# EAGLE board AlidadeEEBoxPowerSupply (EAGLE 4.13)
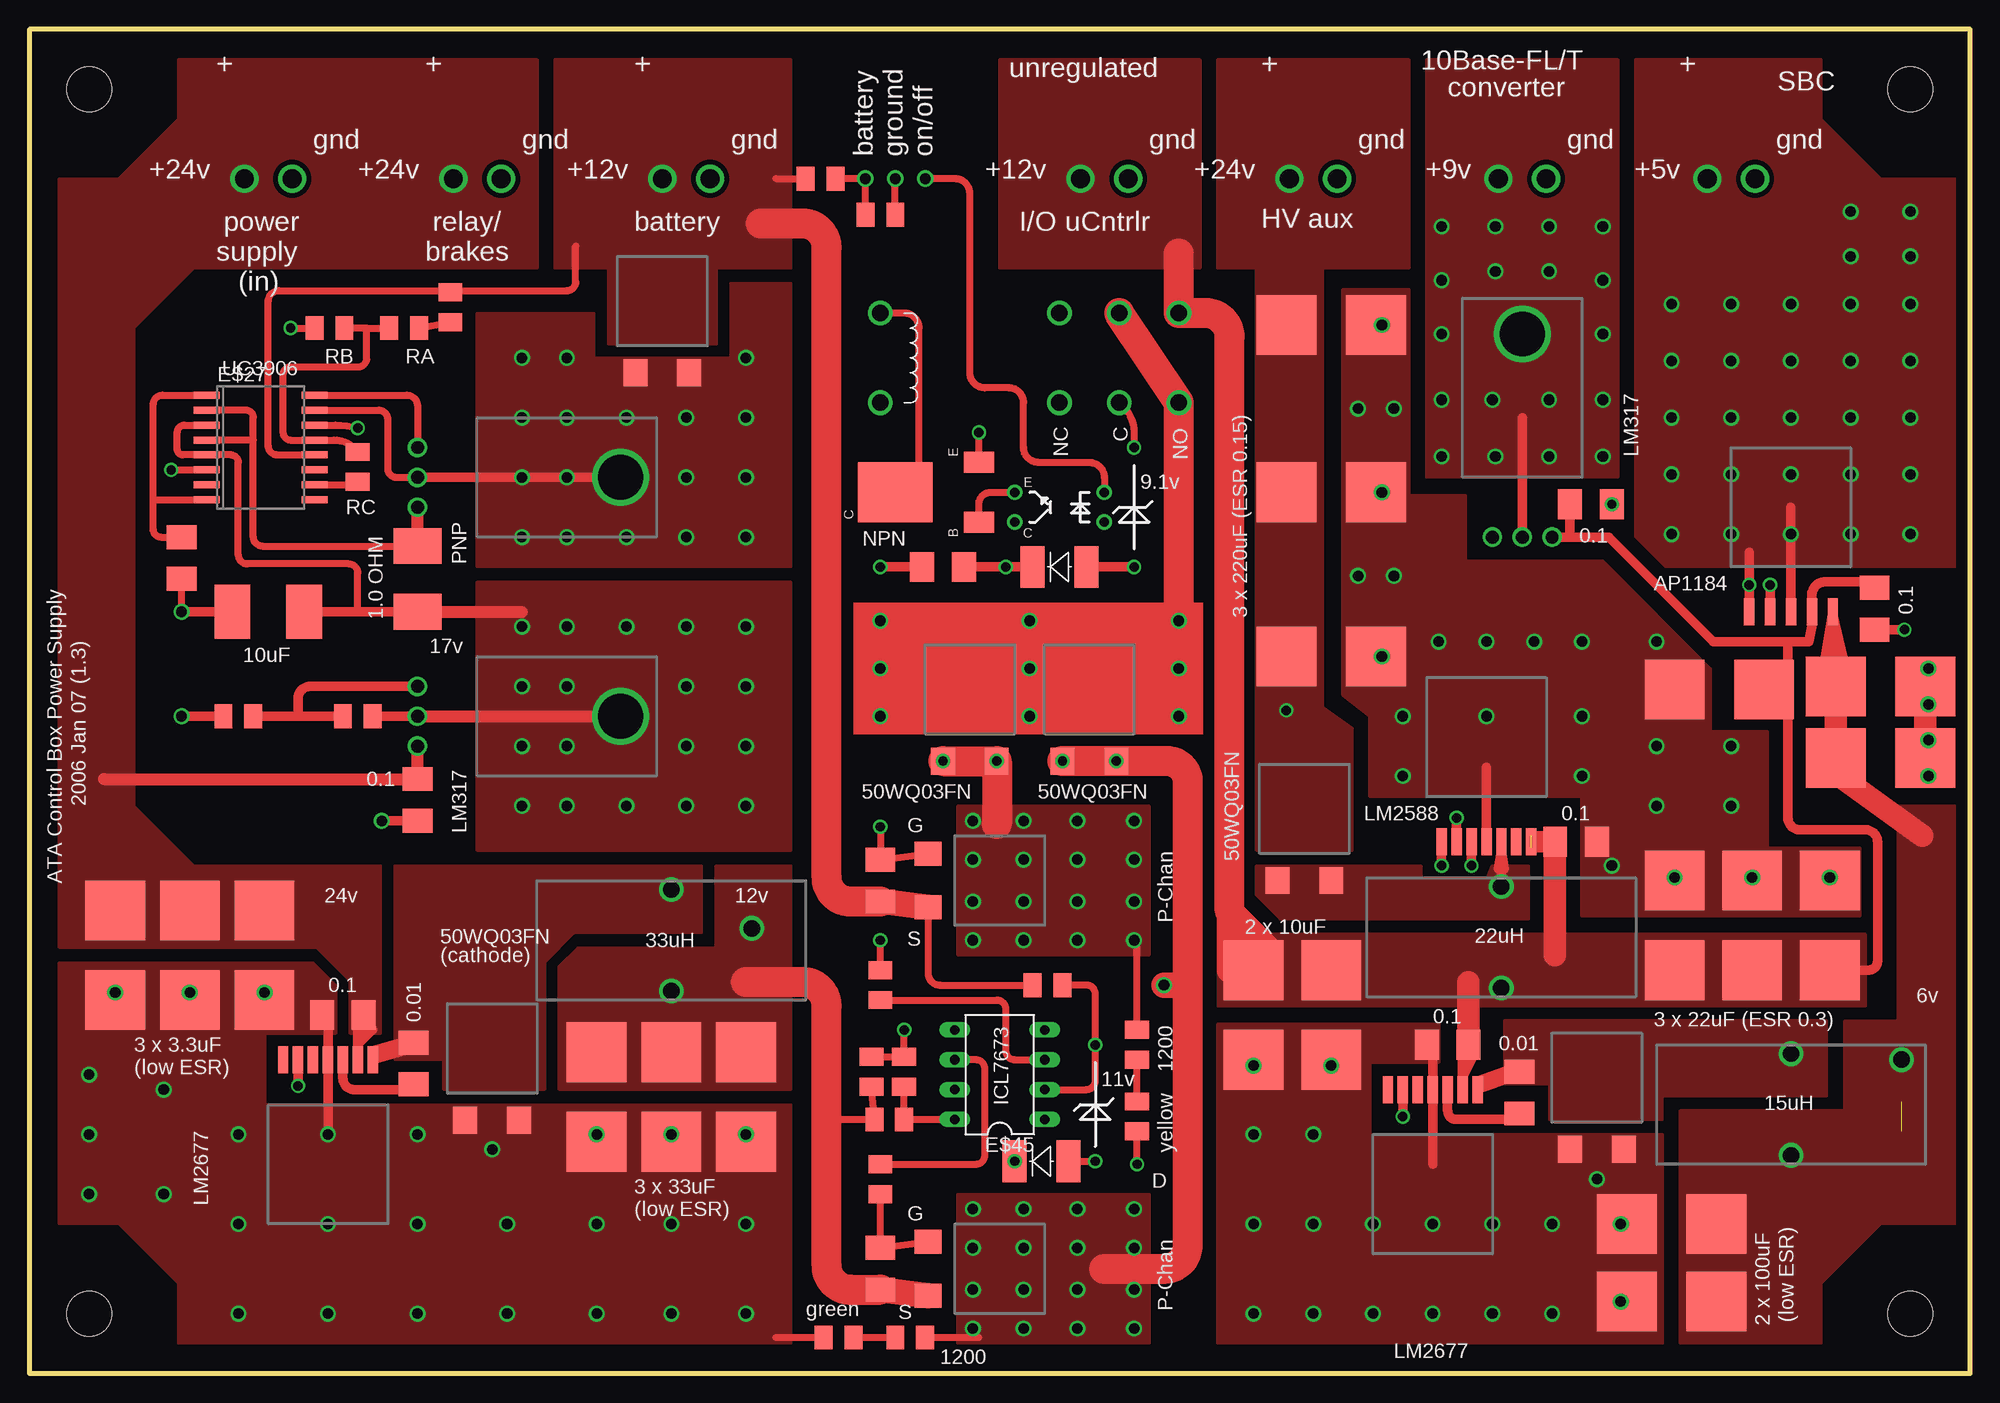
[diagram p0: board, top side]
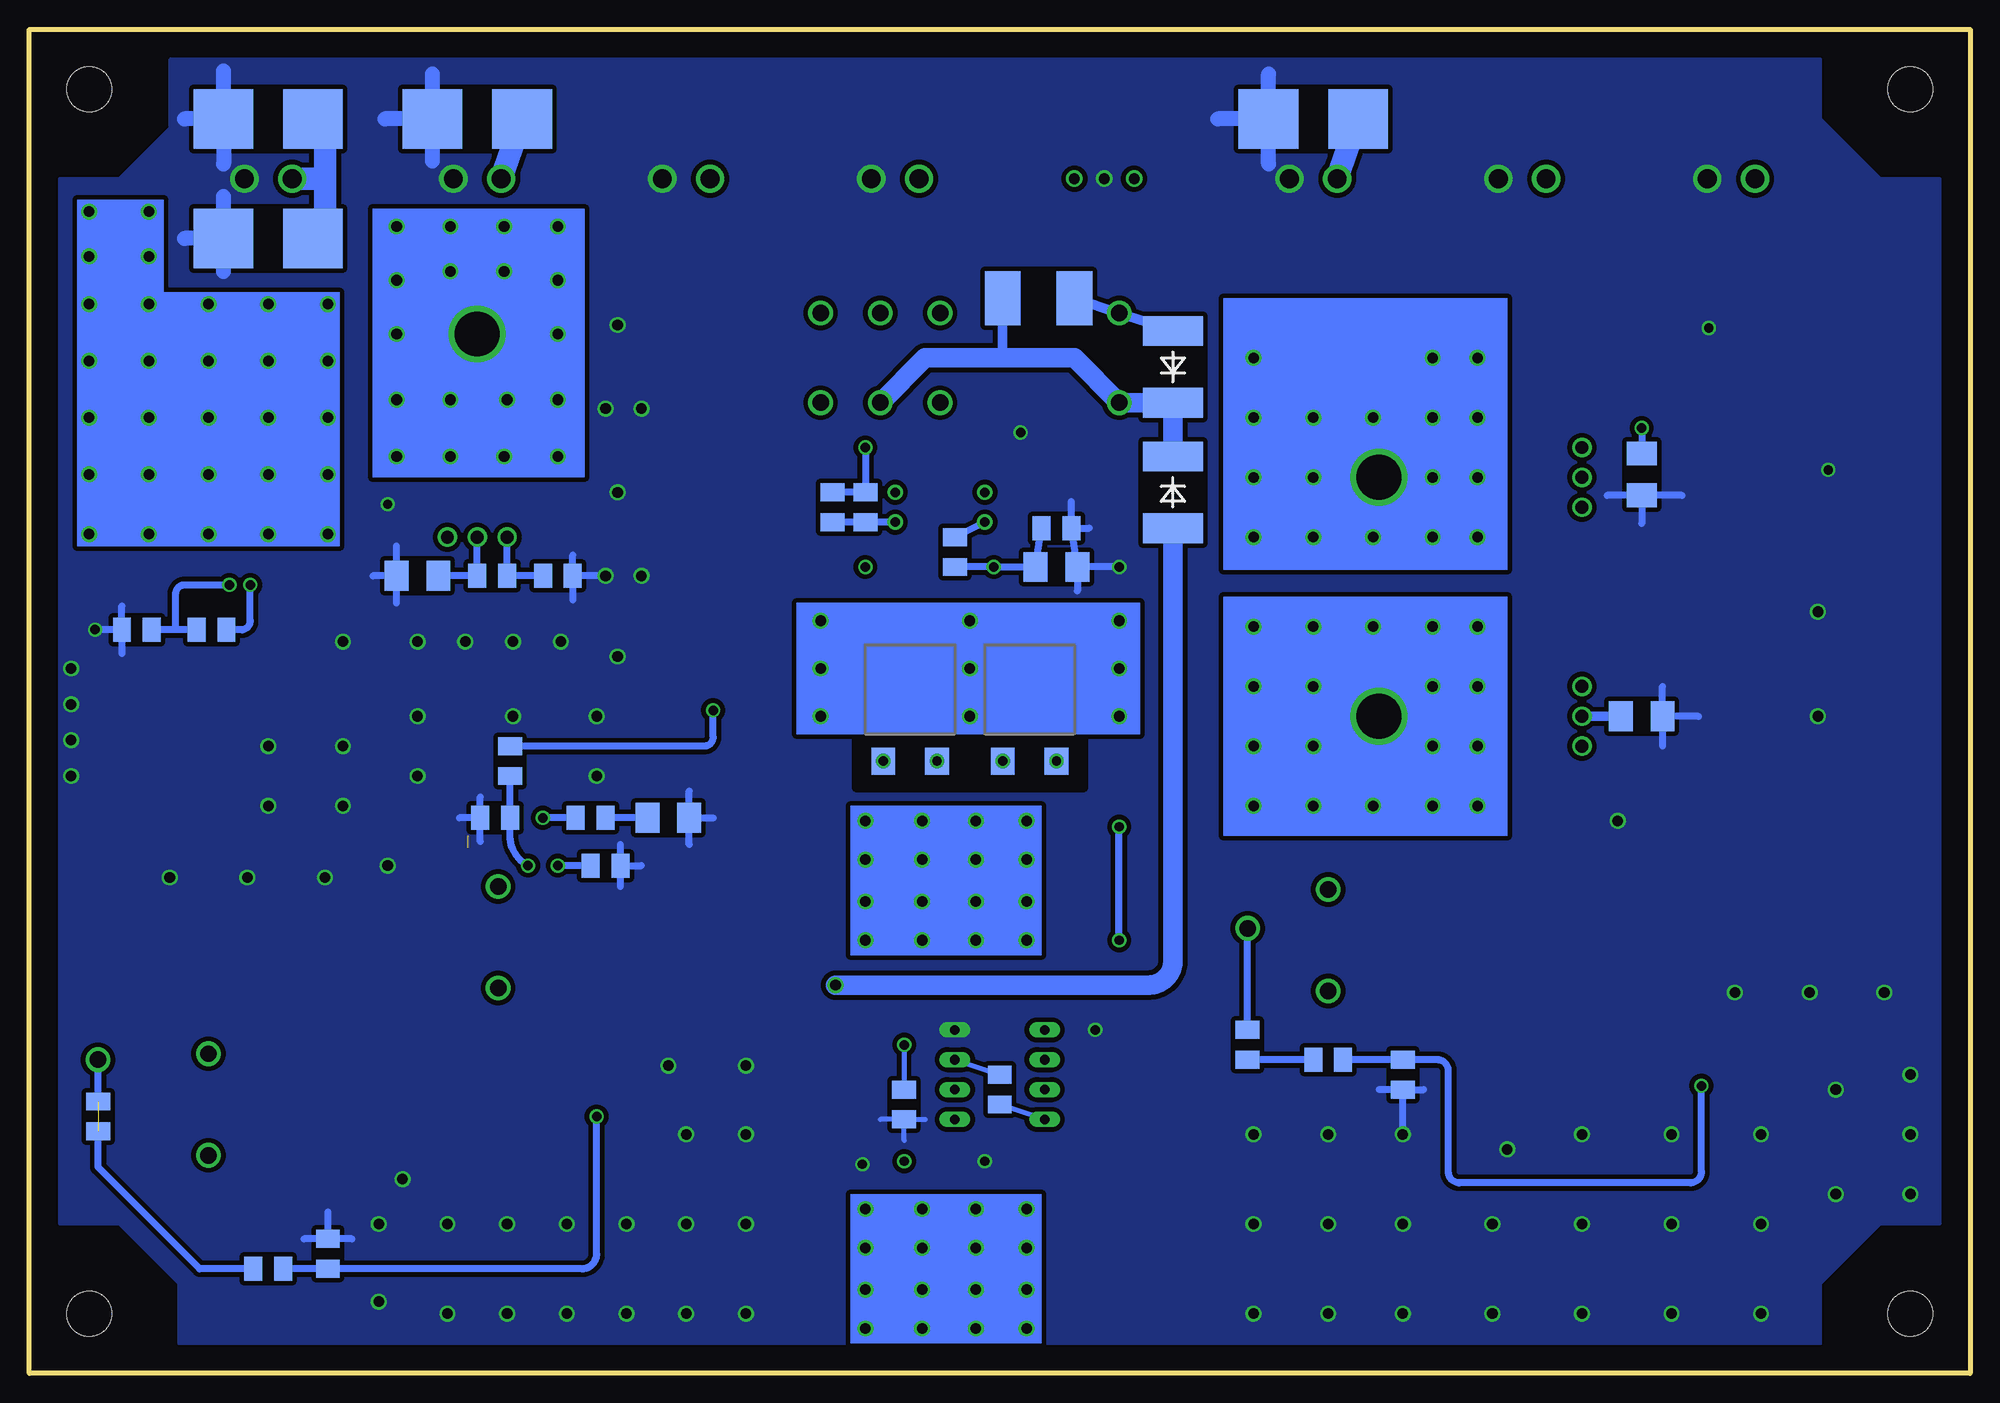
[diagram p1: board, bottom side, seen from below]

Size 165.1 x 114.3 mm. Coordinates in mm from the lower left corner, seen from the top.
Outline: 0,0 165.1,0 165.1,114.3 0,114.3 0,0
Copper layers (1*16): Top 0.035mm / dielectric 1.5mm / Bottom 0.035mm
Design rules "default": minimum track width 10mil, minimum drill 24mil, track to track 8mil, track to pad 8mil, pad to pad 8mil, via to via 8mil, smd to smd 8mil, copper to edge 40mil, drill to drill 8mil, minimum pad ring 10mil, minimum via ring 8mil, stop-mask expansion 4mil, vias tented up to drill 0mil, thermal gap 10mil
Holes 3.81 mm at 160.02,109.22 160.02,5.08 5.08,5.08 5.08,109.22
bRestrict: area 60.5,27.4 to 62.5,28.4; area 47.2,23.4 to 49.3,25.9; area 25.1,54.6 to 28.7,57.1; area 26.7,73.7 to 29.2,77.2; area 65.3,83.8 to 70.4,87.4; area 93,71.6 to 97.8,75.7; area 143.5,104.1 to 151.1,109.2; area 143.5,94 to 151.1,99.1; area 149.1,62.2 to 150.1,64.3; area 155.4,62.2 to 158,64.3; area 125.7,104.1 to 133.3,109.2; area 125.2,66.8 to 126.2,68.8; 20 more areas

## Footprints (pad centres in the part's own frame; a part is rotated, then mirrored left to right if it is on the bottom)
SMD0805 = smd 2.032 x 1.524: P$1 0,1.27; P$2 0,-1.27
LARGETANTALUM = smd 5.08 x 5.08: P$1 0,3.81; P$2 0,-3.81
TWOPRONGPWRCONNECTOR = drill 1.6 round: P$1 -2.032,0; P$2 2.032,0
3PINHEADER = drill 0.9 round: P$1 0,0; P$2 -2.54,0; P$3 2.54,0
LM2677 = smd 0.889 x 2.286: P$1 0,6.35; P$2 -2.54,6.35; P$3 -1.27,6.35; P$4 -3.81,6.35; P$5 2.54,6.35; P$6 1.27,6.35; P$7 3.81,6.35
SMD1206 = smd 2.54 x 2.032: P$1 0,1.778; P$2 0,-1.778
50WQ03FN = smd 2.032 x 2.286: P$1 -2.286,4.826; P$2 2.286,4.826
MEDIUMVERTINDUCTOR = drill 1.4 round: P$1 0,4.318; P$2 0,-4.318
LM317T = drill 3.81 round: P$1 0,7.112 | drill 1.1 round: P$2 0,-10.16; P$3 -2.54,-10.16; P$4 2.54,-10.16
SO16L = smd 0.6 x 2.2: 1 -4.445,-4.6; 2 -3.175,-4.6; 3 -1.905,-4.6; 4 -0.635,-4.6; 5 0.635,-4.6; 6 1.905,-4.6; 7 3.175,-4.6; 8 4.445,-4.6; 9 4.445,4.6; 10 3.175,4.6; 11 1.905,4.6; 12 0.635,4.6; 13 -0.635,4.6; 14 -1.905,4.6; 15 -3.175,4.6; 16 -4.445,4.6
MJE2955T = drill 3.81 round: P$1 0,7.112 | drill 1.1 round: P$2 0,-10.16; P$3 -2.54,-10.16; P$4 2.54,-10.16
RESISTOR1WSMD = smd 4.064 x 3.048: P$1 0,2.794; P$2 0,-2.794
SMALLTANTALUM = smd 4.572 x 3.048: P$1 0,3.048; P$2 0,-3.048
DIL08 = drill 0.813 long: 1 -3.81,-3.81; 2 -1.27,-3.81; 3 1.27,-3.81; 4 3.81,-3.81; 5 3.81,3.81; 6 1.27,3.81; 7 -1.27,3.81; 8 -3.81,3.81
RELAY12VDPDT5A = drill 1.4 round: P$1 -3.81,12.7; P$2 3.81,12.7; P$3 -3.81,-2.54; P$4 -3.81,-7.62; P$5 -3.81,-12.7; P$6 3.81,-12.7; P$7 3.81,-7.62; P$8 3.81,-2.54
SCHOTTKYDIODESMC = smd 5.08 x 2.54: P$1 0,3.048; P$2 0,-3.048
OPTOISOLATOR4PIN = drill 0.8 round: P$1 -3.81,1.27; P$2 -3.81,-1.27; P$3 3.81,1.27; P$4 3.81,-1.27
DPAK = smd 5.08 x 6.35: P$1 0,4.572 | smd 1.778 x 2.54: P$2 -2.54,-2.54; P$3 2.54,-2.54
SILICONDIODESMA = smd 3.556 x 2.032: P$1 0,2.286; P$2 0,-2.286
AP1184 = smd 0.889 x 2.286: P$1 0,6.35; P$3 -1.778,6.35; P$4 -3.556,6.35; P$6 1.778,6.35; P$7 3.556,6.35

## Placement (x,y rotation side)
E$1  [SMD0805]  149.61,63.25 90 bottom
E$2  [SMD0805]  155.96,63.25 90 bottom
E$3  [LARGETANTALUM]  127,106.68 90 bottom
E$4  [SMD0805]  120.14,67.82 90 bottom
E$5  [TWOPRONGPWRCONNECTOR]  20.32,101.6 0 top
E$6  [TWOPRONGPWRCONNECTOR]  38.1,101.6 0 top
E$7  [TWOPRONGPWRCONNECTOR]  144.78,101.6 0 top
E$8  [TWOPRONGPWRCONNECTOR]  55.88,101.6 0 top
E$9  [TWOPRONGPWRCONNECTOR]  91.44,101.6 0 top
E$10  [TWOPRONGPWRCONNECTOR]  127,101.6 0 top
E$11  [TWOPRONGPWRCONNECTOR]  109.22,101.6 0 top
E$12  [3PINHEADER]  73.66,101.6 0 top
E$13  [LM2677]  25.4,20.32 0 top
E$14  [SMD1206]  32.7,26.35 0 top
E$15  [50WQ03FN]  39.37,26.35 180 top
E$16  [LARGETANTALUM]  48.26,23.5 0 top
E$17  [LARGETANTALUM]  54.61,23.5 0 top
E$18  [LARGETANTALUM]  60.96,23.5 0 top
E$19  [SMD1206]  26.67,30.48 90 top
E$20  [LARGETANTALUM]  20,35.56 0 top
E$21  [LARGETANTALUM]  13.65,35.56 0 top
E$22  [LARGETANTALUM]  7.3,35.56 0 top
E$23  [MEDIUMVERTINDUCTOR]  54.61,36.83 0 top
E$24  [SMD0805]  61.47,27.94 180 bottom
E$25  [LM317T]  43.18,55.88 270 top
E$26  [SMD0805]  48.26,25.4 180 bottom
E$27  [SO16L]  19.68,78.74 270 top
E$28  [MJE2955T]  43.18,76.2 270 top
E$29  [50WQ03FN]  53.85,89.92 180 top
E$30  [RESISTOR1WSMD]  33.02,67.56 0 top
E$31  [SMD1206]  33.02,48.77 0 top
E$32  [SMD1206]  27.94,55.88 90 bottom
E$33  [SMD0805]  27.94,55.88 90 top
E$34  [SMD0805]  17.78,55.88 90 top
E$35  [SMALLTANTALUM]  20.32,64.77 90 top
E$36  [SMD1206]  12.95,69.34 0 top
E$37  [SMD0805]  27.94,77.09 0 top
E$38  [SMD1206]  27.94,76.45 0 bottom
E$39  [SMD0805]  31.88,88.9 90 top
E$40  [SMD0805]  25.53,88.9 90 top
E$41  [50WQ03FN]  80.01,56.9 180 top
E$42  [50WQ03FN]  81.28,41.91 90 top
E$43  [50WQ03FN]  90.17,56.9 180 top
E$44  [50WQ03FN]  81.28,8.89 90 top
E$45  [DIL08]  82.55,25.4 90 top
E$46  [SMD1206]  72.39,41.91 0 top
E$47  [SMD1206]  72.39,8.89 0 top
E$48  [RELAY12VDPDT5A]  85.09,86.36 90 top
E$49  [SCHOTTKYDIODESMC]  67.82,85.6 0 bottom
E$50  [OPTOISOLATOR4PIN]  87.63,73.66 180 top
E$51  [DPAK]  78.23,74.93 90 top
E$52  [SCHOTTKYDIODESMC]  67.82,74.93 180 bottom
E$53  [SMD0805]  93.98,73.66 0 bottom
E$54  [SILICONDIODESMA]  87.63,68.58 270 top
E$55  [SMD1206]  77.72,68.58 270 bottom
E$56  [SMD1206]  77.72,68.58 90 top
E$57  [LARGETANTALUM]  55.88,106.68 270 bottom
E$58  [SMD0805]  73.15,21.59 90 top
E$59  [SMD0805]  74.42,25.65 180 top
E$60  [SMD0805]  72.39,16.51 180 top
E$61  [SMD0805]  96.77,73.66 0 bottom
E$62  [SMD0805]  86.61,33.02 90 top
E$63  [SMD0805]  94.23,27.94 0 top
E$64  [SMD0805]  94.23,21.84 0 top
E$65  [SMD0805]  72.39,33.02 0 top
E$66  [SMD0805]  68.83,3.05 90 top
E$67  [SMD0805]  74.93,3.05 90 top
E$68  [LM2677]  119.38,17.78 0 top
E$69  [SMD1206]  120.65,27.94 90 top
E$70  [LARGETANTALUM]  110.74,30.48 0 top
E$71  [LARGETANTALUM]  104.14,30.48 0 top
E$72  [SMD1206]  126.75,23.88 0 top
E$73  [50WQ03FN]  133.35,23.88 180 top
E$74  [MEDIUMVERTINDUCTOR]  149.86,22.86 0 top
E$75  [LARGETANTALUM]  139.7,12.7 90 top
E$76  [LARGETANTALUM]  139.7,6.1 90 top
E$77  [LARGETANTALUM]  139.95,38.1 0 top
E$78  [LARGETANTALUM]  153.16,38.1 0 top
E$79  [LARGETANTALUM]  146.56,38.1 0 top
E$80  [MEDIUMVERTINDUCTOR]  125.22,37.08 180 top
E$81  [50WQ03FN]  108.46,46.74 180 top
E$82  [LM2677]  123.95,51.56 180 top
E$83  [LARGETANTALUM]  110.74,89.15 90 top
E$84  [LARGETANTALUM]  110.74,74.93 90 top
E$85  [LARGETANTALUM]  110.74,60.96 90 top
E$86  [LM317T]  127,81.28 0 top
E$87  [AP1184]  149.86,71.12 180 top
E$88  [SMD1206]  131.57,45.21 90 top
E$89  [LARGETANTALUM]  157.48,58.42 90 top
E$90  [LARGETANTALUM]  157.48,52.32 90 top
E$91  [SMD1206]  156.97,65.02 180 top
E$92  [SMD1206]  132.84,73.91 90 top
E$93  [LARGETANTALUM]  144.78,106.68 270 bottom
E$94  [LARGETANTALUM]  144.78,96.52 270 bottom
E$95  [SMD0805]  125.73,67.82 90 bottom
E$96  [SMD1206]  132.08,67.82 270 bottom
E$97  [SMD0805]  117.35,47.24 270 bottom
E$98  [SMD0805]  116.08,43.18 270 bottom
E$99  [SMD1206]  110.74,47.24 270 bottom
E$100  [SMD0805]  125.48,47.24 270 bottom
E$101  [SMD0805]  124.21,52.07 180 bottom
E$102  [SMD0805]  139.7,10.16 180 bottom
E$103  [SMD0805]  144.78,8.89 90 bottom
E$104  [SMD0805]  67.31,101.6 90 top
E$105  [SMD0805]  72.39,98.55 90 top
E$106  [SMD0805]  82.55,24.13 0 bottom
E$107  [SMD0805]  54.61,26.67 270 bottom
E$108  [SMD0805]  159.26,21.84 0 bottom
E$109  [SMALLTANTALUM]  79.25,91.44 270 bottom
E$110  [SMD0805]  77.72,71.88 270 bottom
E$111  [SMD0805]  86.36,69.85 180 bottom
E$112  [SMD0805]  90.68,22.86 0 bottom
E$113  [LARGETANTALUM]  143.76,58.17 90 top
E$114  [SMD0805]  35.81,90.68 0 top
E$115  [SMD0805]  71.63,25.65 0 top
E$116  [SILICONDIODESMA]  86.11,18.03 270 top
E$117  [50WQ03FN]  80.01,56.9 180 bottom
E$118  [50WQ03FN]  90.17,56.9 180 bottom

## Library data of the parts
E$1-E$26 E$28-E$44 E$46-E$118 = rfa
E$27 = linear
E$45 = ic-package

## Nets
GND: E$2.P$1 E$3.P$1 E$4.P$2 E$5.P$2 E$6.P$2 E$7.P$2 E$8.P$2 E$9.P$2 E$10.P$2 E$11.P$2 E$12.P$1 E$13.P$1 E$15.P$1 E$15.P$2 E$16.P$2 E$17.P$2 E$18.P$2 E$19.P$1 E$20.P$2 E$21.P$2 E$22.P$2 E$26.P$1 E$31.P$2 E$32.P$2 E$34.P$1 E$35.P$1 E$36.P$2 E$38.P$2 E$40.P$1 E$45.4 E$51.P$3 E$55.P$1 E$56.P$1 E$57.P$2 E$59.P$2 E$64.P$2 E$66.P$1 E$68.P$1 E$69.P$1 E$70.P$2 E$71.P$2 E$73.P$1 E$73.P$2 E$75.P$1 E$76.P$1 E$77.P$1 E$78.P$1 E$79.P$1 E$82.P$1 E$83.P$2 E$84.P$2 E$85.P$2 E$88.P$2 E$91.P$1 E$93.P$2 E$94.P$2 E$96.P$2 E$98.P$1 E$99.P$1 E$100.P$2 E$102.P$2 E$105.P$2 E$110.P$1 E$112.P$2 E$113.P$1 E$115.P$1
S$1: E$13.P$2 E$26.P$2 E$107.P$1
S$2: E$48.P$2 E$109.P$1
S$3: E$24.P$1 E$107.P$2
S$4: E$102.P$1 E$103.P$2
S$5: E$12.P$2 E$104.P$2 E$105.P$1
S$6: E$100.P$1 E$101.P$1
S$7: E$13.P$6
S$8: E$54.P$2 E$56.P$2 E$110.P$2 E$111.P$1
S$9: E$45.2 E$62.P$2 E$112.P$1
S$10: E$25.P$1 E$25.P$2 E$30.P$2 E$32.P$1 E$33.P$2 E$35.P$2
S$11: E$38.P$1
S$12: E$28.P$1 E$28.P$2 E$29.P$1 E$29.P$2
S$13: E$50.P$4 E$51.P$2
S$14: E$25.P$3 E$33.P$1 E$34.P$2
S$15: E$41.P$1 E$41.P$2 E$63.P$1
S$16: E$44.P$2 E$47.P$1 E$60.P$1
S$17: E$48.P$5 E$48.P$7
S$18: E$50.P$3 E$111.P$2
S$19: E$28.P$4 E$30.P$1
S$20: E$50.P$1 E$53.P$2 E$61.P$2
S$22: E$45.8 E$58.P$2 E$59.P$1 E$106.P$2
S$23: E$28.P$3
S$24: E$37.P$1 E$40.P$2
S$26: E$54.P$1
S$27: E$48.P$1 E$48.P$4 E$49.P$2 E$52.P$2 E$53.P$1 E$61.P$1 E$109.P$2
S$28: E$45.3 E$65.P$2 E$106.P$1
S$29: E$45.6 E$60.P$2
S$30: E$43.P$1 E$43.P$2 E$52.P$1 E$67.P$2
S$31: E$12.P$3 E$50.P$2
S$32: E$114.P$2
S$33: E$97.P$1 E$99.P$2
S$34: E$63.P$2 E$64.P$1
S$35: E$116.P$1
S$37: E$82.P$5 E$97.P$2
S$38: E$42.P$2 E$46.P$1 E$65.P$1
S$39: E$82.P$7 E$98.P$2
S$41: E$66.P$2 E$67.P$1
S$42: E$80.P$2 E$81.P$1 E$81.P$2
S$46: E$4.P$1 E$86.P$3 E$95.P$2
S$49: E$89.P$1 E$90.P$1
S$50: E$87.P$4
S$58: E$68.P$6
S$59: E$68.P$5
S$60: E$13.P$7 E$14.P$1 E$23.P$1
S$62: E$68.P$7 E$72.P$1 E$74.P$1
S$64: E$1.P$1 E$2.P$2 E$87.P$6
S$83: E$89.P$2
V5SBC: E$1.P$2 E$7.P$1 E$87.P$1 E$87.P$7
V6SBC: E$74.P$2 E$75.P$2 E$76.P$2 E$103.P$1 E$108.P$1 E$108.P$2
V9: E$3.P$2 E$10.P$1 E$86.P$1 E$86.P$2 E$95.P$1 E$96.P$1
V12BAT: E$8.P$1 E$42.P$1 E$46.P$2 E$57.P$1 E$62.P$1 E$104.P$1
V12OUT: E$9.P$1 E$48.P$6 E$69.P$2 E$70.P$1 E$71.P$1 E$77.P$2 E$78.P$2 E$79.P$2 E$80.P$1 E$82.P$4 E$86.P$4 E$87.P$3 E$88.P$1 E$92.P$1 E$113.P$2
V12PS: E$16.P$1 E$17.P$1 E$18.P$1 E$23.P$2 E$24.P$2 E$44.P$1 E$47.P$2 E$58.P$1 E$115.P$2
V24: E$5.P$1 E$6.P$1 E$13.P$5 E$19.P$2 E$20.P$1 E$21.P$1 E$22.P$1 E$25.P$4 E$31.P$1
V24HVAUX: E$11.P$1 E$83.P$1 E$84.P$1 E$85.P$1 E$101.P$2

## Tracks (layer width: path | path; a pad name or v marks a point on that pad's centre or on a via)
GND  (via drill 0.8, 0.9)
  Top 0.61: 63.5,3.05 E$66.P$1 | v12.95,64.77 E$36.P$2 | v12.06,76.83 14.99,76.83 | v74.42,29.21 E$59.P$2 E$115.P$1 | v22.23,88.9 E$40.P$1 | E$51.P$3 v80.77,80.01 | E$105.P$2 E$12.P$1 | v94.23,17.78 E$64.P$2
  Top 0.813: v25.4,20.32 25.4,25.4 | E$13.P$1 25.4,30.16 | v12.95,55.88 E$34.P$1 | v29.97,46.99 E$31.P$2 | v12.95,64.77 E$35.P$1 | 119.38,27.94 E$68.P$1 119.38,17.78 | v72.39,68.58 E$56.P$1 | E$82.P$1 123.95,51.56 | v159.51,63.25 E$91.P$1
  Bottom 0.406: E$112.P$2 88.9,21.59 | E$112.P$2 92.71,21.59 | 90.68,19.81 E$112.P$2
  Bottom 0.61: E$26.P$1 46.48,24.13 | E$26.P$1 50.29,24.13 | v48.26,20.32 E$26.P$1 | E$32.P$2 26.16,58.42 | E$32.P$2 26.16,53.34 | 23.11,55.88 E$32.P$2 | E$38.P$2 30.86,74.68 | E$38.P$2 27.94,72.26 | 24.51,74.68 E$38.P$2 | E$110.P$1 76.45,74.17 | E$110.P$1 74.93,71.88 | E$56.P$1 E$110.P$1 | E$56.P$1 75.95,66.55 | v72.39,68.58 E$56.P$1 | E$102.P$2 139.7,13.72 | E$102.P$2 141.73,11.43 | 137.67,11.43 E$102.P$2 | E$99.P$1 108.97,49.53 | E$99.P$1 106.93,47.24 | 108.97,44.96 E$99.P$1 | E$98.P$1 114.81,44.96 | E$98.P$1 113.03,43.18 | 114.81,41.4 E$98.P$1 | E$100.P$2 126.75,49.02 | E$100.P$2 128.52,47.24 | 126.75,45.21 E$100.P$2 | E$4.P$2 118.87,69.6 | E$4.P$2 118.87,65.79 | v116.08,67.82 E$4.P$2 | E$96.P$2 133.86,70.36 | E$96.P$2 135.89,67.82 | 133.86,65.53 E$96.P$2 | E$2.P$1 v159.51,63.25 | E$2.P$1 157.23,65.28 | E$2.P$1 157.23,61.21
  Bottom 1.27: E$93.P$2 148.59,110.74 | E$93.P$2 148.59,102.87 | E$93.P$2 151.89,106.68 | E$57.P$2 59.69,110.49 | E$57.P$2 64.01,106.68 | 59.69,102.87 E$57.P$2 | E$3.P$1 130.81,110.49 | E$3.P$1 134.87,106.68 | 130.81,103.12 E$3.P$1 | E$94.P$2 148.59,100.08 | E$94.P$2 151.89,96.52 | 148.59,93.73 E$94.P$2
  other vias: 5.08,15.24 17.78,5.08 5.08,20.32 25.4,5.08 17.78,12.7 5.08,25.4 7.3,32.38 33.02,5.08 17.78,20.32 13.65,32.38 40.64,5.08 33.02,12.7 20,32.38 48.26,5.08 40.64,12.7 33.02,20.32 39.37,19.05 48.26,12.7 60.96,5.08 60.96,12.7 54.61,20.32 60.96,20.32 104.14,5.08 109.22,5.08 104.14,12.7 114.3,5.08 109.22,12.7 104.14,20.32 119.38,5.08 114.3,12.7 104.14,26.16 109.22,20.32 124.46,5.08 119.38,12.7 110.74,26.16 129.54,5.08 124.46,12.7 135.38,6.1 129.54,12.7 133.35,16.51 135.38,12.7 116.84,50.8 116.84,55.88 115.06,60.96 113.03,67.82 123.95,55.88 119.89,62.23 139.95,42.16 123.95,62.23 132.08,50.8 138.43,48.26 146.56,42.16 128.02,62.23 115.06,74.93 132.08,55.88 138.43,53.34 113.03,82.04 132.08,62.23 144.78,48.26 153.16,42.16 116.08,82.04 144.78,53.34 138.43,62.23 115.06,89.15 134.62,73.91 161.54,50.8 161.54,53.85 161.54,56.9 161.54,59.94 83.82,18.03 11.43,24.13 11.43,15.24 25.4,12.7 54.61,12.7 54.61,5.08 134.62,43.18
  pour Bottom (isolate 0.406, no thermals): 2.54,101.6 7.62,101.6 12.7,106.68 12.7,111.76 153.16,111.76 153.16,105.92 157.48,101.6 162.56,101.6 162.56,12.7 157.48,12.7 152.4,7.62 152.4,2.54 12.7,2.54 12.7,7.62 7.62,12.7 2.54,12.7
  pour Top (isolate 0.305, no thermals): 2.54,34.92 24.13,34.92 26.04,33.02 26.04,28.89 20,28.89 20,22.86 64.77,22.86 64.77,2.54 12.7,2.54 12.7,7.62 7.62,12.7 2.54,12.7
  pour Top (isolate 0.305, no thermals): 111.76,92.2 117.35,92.2 117.35,74.68 122.17,74.68 122.17,69.09 133.86,69.09 143,59.94 143,54.61 147.83,54.61 147.83,44.7 155.7,44.7 155.7,38.86 132.08,38.86 132.08,49.02 114.05,49.02 114.05,55.88 111.76,57.66
  pour Top (isolate 0.305, no thermals): 101.09,29.72 119.89,29.72 119.89,26.42 114.05,26.42 114.05,20.32 138.94,20.32 138.94,2.54 101.09,2.54
S$1  (via drill 0.8)
  Top 0.813: v22.86,24.45 E$13.P$2
  Bottom 0.61: v22.86,24.45 22.86,17.14 arc90 23.81,16.19 43.43,16.19 arc90 44.39,17.14 44.39,25.72 arc-90 45.34,26.67 E$26.P$2 E$107.P$1
S$2
  Top 0.61: E$48.P$2 74.42,90.17 arc-90 75.69,88.9 75.69,74.93
  Bottom 0.813: 67.56,88.65 E$48.P$2 arc2 E$109.P$1
S$3
  Bottom 0.61: E$107.P$2 E$24.P$1
S$4  (via drill 0.8)
  Top 0.813: v116.84,21.84 116.84,23.88
  Bottom 0.61: E$103.P$2 E$102.P$1 118.11,8.89 arc-90 116.84,10.16 v116.84,21.84
S$5
  Top 0.61: E$104.P$2 E$12.P$2 E$105.P$1
S$6  (via drill 0.8)
  Top 0.813: v122.68,43.18 122.68,44.96
  Bottom 0.61: E$101.P$1 E$100.P$1 124.21,45.72 arc-62 v122.68,43.18
S$7
  Top 0.813: E$13.P$6 26.67,25.08 arc90 27.62,24.13 32.7,24.13
S$8  (via drill 0.8)
  Top 0.813: E$56.P$2 v83.06,68.58 E$54.P$2
  Bottom 0.61: E$111.P$1 v83.06,68.58 E$56.P$2 E$110.P$2
S$9  (via drill 0.8)
  Top 0.61: E$45.2 89.92,24.13 arc90 90.68,24.89 v90.68,27.94 90.68,32.26 arc90 89.92,33.02 E$62.P$2
  Bottom 0.406: v90.68,27.94 E$112.P$1
S$10  (via drill 0.9)
  Top 0.61: 15.11,80.64 13.21,80.64 arc90 12.57,80.01 12.57,78.61 arc90 13.08,78.11 17.14,78.11 arc-90 17.78,77.47 17.78,69.6 arc90 18.54,68.83 27.18,68.83 arc-90 27.94,68.07 27.94,64.77
  Top 0.813: E$33.P$2 E$25.P$2 | E$35.P$2 27.94,64.77 E$30.P$2
  Top 1.016: E$25.P$2 E$25.P$1 | E$30.P$2 41.91,64.77
  Bottom 0.813: E$25.P$2 E$32.P$1
  other vias: 41.91,63.5 45.72,63.5 50.8,63.5 55.88,63.5 60.96,63.5 41.91,58.42 45.72,58.42 55.88,58.42 60.96,58.42 41.91,53.34 45.72,53.34 55.88,53.34 60.96,53.34 41.91,48.26 45.72,48.26 50.8,48.26 55.88,48.26 60.96,48.26
  pour Top (isolate 0.305, no thermals): 38.1,67.31 64.77,67.31 64.77,44.45 38.1,44.45
S$11  (via drill 0.8)
  Top 0.61: 24.26,80.64 26.04,80.64 arc-15 v27.94,80.39
  Bottom 0.61: v27.94,80.39 E$38.P$1
S$12  (via drill 0.9)
  Top 0.61: 24.26,81.92 29.72,81.92 arc-90 30.48,81.15 30.48,76.96 arc90 31.24,76.2 E$28.P$2
  Top 0.813: E$28.P$2 v41.91,76.2 v45.72,76.2 E$28.P$1
  other vias: 41.91,86.36 45.72,86.36 60.96,86.36 41.91,81.28 45.72,81.28 50.8,81.28 55.88,81.28 60.96,81.28 55.88,76.2 60.96,76.2 41.91,71.12 45.72,71.12 50.8,71.12 55.88,71.12 60.96,71.12
  pour Top (isolate 0.305, no thermals): 64.77,92.71 64.77,68.58 38.1,68.58 38.1,90.17 48.01,90.17 48.01,86.36 59.69,86.36 59.69,92.71
S$13
  Top 0.61: E$50.P$4 81.79,74.93 arc90 80.77,73.91 E$51.P$2
S$14
  Top 0.813: 22.86,55.88 E$33.P$1 | E$34.P$2 22.86,55.88 | 22.86,55.88 22.86,57.4 arc-90 23.88,58.42 E$25.P$3
S$15  (via drill 0.8, 0.9)
  Top 0.61: E$63.P$1 94.23,36.83
  Top 2.54: 82.3,46.74 E$41.P$1 E$41.P$2
  other vias: 77.72,52.07 82.3,52.07 80.26,46.99 84.58,46.99 89.15,46.99 93.98,36.83 93.98,46.99 80.26,43.69 84.58,43.69 89.15,43.69 93.98,43.69 80.26,40.13 84.58,40.13 89.15,40.13 93.98,40.13 80.26,36.83 84.58,36.83 89.15,36.83
  pour Top (isolate 0.305, no thermals): 78.99,48.26 95.25,48.26 95.25,35.56 78.99,35.56
S$16
  Top 0.61: E$44.P$2 E$47.P$1 E$60.P$1
S$17
  Top 2.54: E$48.P$7 E$48.P$5 97.79,64.26
S$18
  Bottom 0.61: E$50.P$3 E$111.P$2
S$19
  Top 0.61: 14.99,81.92 18.41,81.92 arc-90 19.05,81.28 19.05,79.38 | 19.05,79.38 19.05,71.12 arc90 19.81,70.36 E$30.P$1 | 19.05,79.38 15.11,79.38
  Top 1.016: E$30.P$1 E$28.P$4
S$20
  Bottom 0.61: E$50.P$1 E$53.P$2 E$61.P$2
S$21
  Top 0.61: 15.11,83.19 11.3,83.19 arc90 10.54,82.42 10.54,74.3 | 10.54,74.3 10.54,71.75 arc90 11.18,71.12 12.83,71.12 | 10.54,74.3 14.99,74.3
S$22
  Top 0.61: E$59.P$1 E$58.P$2 E$45.8
  Bottom 0.406: E$45.8 E$106.P$2
S$23
  Top 0.61: 24.13,83.19 32.13,83.19 arc-90 33.02,82.3 E$28.P$3
S$24
  Top 0.61: E$37.P$1 arc53 25.91,79.38 22.23,79.38 arc-90 21.59,80.01 21.59,84.96 arc-90 22.23,85.6 27.81,85.6 arc90 28.7,86.23 28.7,88.9 | 28.7,88.9 E$40.P$2 | 28.7,88.9 30.73,88.9
S$25
  Top 0.61: 24.26,75.56 27.94,75.56
S$26  (via drill 0.8)
  Top 0.813: E$54.P$1 v93.98,68.58
S$27  (via drill 0.8)
  Top 0.61: v93.98,78.74 93.98,80.01 arc53 E$48.P$4
  Bottom 0.61: E$61.P$1 E$53.P$1 v93.98,78.74
  Bottom 0.813: 82.3,86.36 E$109.P$2
  Bottom 1.676: E$48.P$4 88.9,86.36 82.3,86.36 76.2,86.36 E$48.P$1 E$49.P$2 E$52.P$2
S$28
  Top 0.61: E$45.3 83.82,26.67 arc-90 83.06,27.43 83.06,30.99 arc90 82.3,31.75 E$65.P$2
  Bottom 0.406: E$45.3 E$106.P$1
S$29
  Top 0.61: E$45.6 80.52,26.67 arc-90 81.28,25.91 81.28,18.54 arc-90 80.52,17.78 E$60.P$2
S$30  (via drill 0.8, 0.9)
  Top 0.61: E$67.P$2 80.77,3.05
  Top 2.184: 98.55,33.02 v96.52,33.02
  Top 2.54: E$43.P$2 E$43.P$1 96.77,52.07 arc-90 98.55,50.29 98.55,33.02 98.55,10.92 arc-90 96.52,8.89 91.44,8.89
  Bottom 1.676: E$52.P$1 67.82,35.05 arc90 69.85,33.02 v96.52,33.02
  other vias: 87.88,52.07 92.46,52.07 80.26,13.97 84.58,13.97 89.15,13.97 93.98,13.97 80.26,10.67 84.58,10.67 89.15,10.67 93.98,10.67 80.26,7.11 84.58,7.11 89.15,7.11 93.98,7.11 80.26,3.81 84.58,3.81 89.15,3.81 93.98,3.81
  pour Top (isolate 0.305, no thermals): 78.99,15.24 95.25,15.24 95.25,2.54 78.99,2.54
S$31
  Top 0.61: E$12.P$3 78.74,101.6 arc-90 80.01,100.33 80.01,85.09 arc90 81.28,83.82 83.31,83.82 arc-90 84.58,82.55 84.58,78.74 arc90 85.85,77.47 90.17,77.47 arc-90 91.44,76.2 E$50.P$2
S$32
  Top 0.61: 33.02,88.9 E$114.P$2
S$33
  Bottom 0.61: E$99.P$2 E$97.P$1
S$34
  Top 0.61: E$64.P$1 E$63.P$2
S$35  (via drill 0.8)
  Top 0.61: E$116.P$1 v90.68,18.03
S$36  (via drill 0.9)
  other vias: 72.39,55.88
S$37  (via drill 0.8)
  Top 0.813: v121.41,47.24 E$82.P$5
  Bottom 0.61: E$97.P$2 v121.41,47.24
S$38  (via drill 0.8)
  Top 0.61: E$42.P$2 E$46.P$1 v72.39,46.48 | E$65.P$1 v72.39,36.83
  Bottom 0.61: v72.39,36.83 v72.39,46.48
S$39  (via drill 0.8)
  Top 0.813: v120.14,43.18 E$82.P$7
  Bottom 0.61: E$98.P$2 v120.14,43.18
S$40  (via drill 0.9)
  other vias: 72.39,64.01
S$41
  Top 0.61: E$66.P$2 E$67.P$1
S$42
  Top 0.813: E$80.P$2 125.22,44.45 | 125.22,44.45 125.22,44.96 | 125.22,44.45 124.97,42.93 | 125.22,44.45 125.48,42.93
  pour Top (isolate 0.305, no thermals): 104.39,43.18 118.36,43.18 118.36,41.91 123.95,41.91 124.46,43.18 127.51,43.18 127.51,38.61 106.43,38.61 104.39,40.64
S$43  (via drill 0.9)
  other vias: 72.39,59.94
S$44  (via drill 0.9)
  other vias: 97.79,55.88
S$45  (via drill 0.9)
  other vias: 97.79,59.94
S$46
  Bottom 0.61: E$86.P$3 E$95.P$2 E$4.P$1
S$47  (via drill 0.9)
  other vias: 97.79,64.01
S$48  (via drill 0.9)
  other vias: 85.09,64.01
S$49
  Top 1.93: E$90.P$1 E$89.P$1
S$50
  Top 0.813: 153.42,64.52 E$87.P$4 152.65,60.2 | 153.42,64.52 153.42,59.44 | 154.43,60.2 153.42,64.52
S$51  (via drill 0.9)
  other vias: 85.09,59.94
S$52  (via drill 0.9)
  other vias: 85.09,55.88
S$58
  Top 0.813: E$68.P$6 120.65,22.35 arc90 121.41,21.59 126.75,21.59
S$59
  Top 0.813: E$68.P$5 121.92,24.89 | 121.92,24.89 121.92,25.15 | 121.92,25.15 121.92,27.94 | 121.92,24.89 122.43,27.18 | 121.92,25.15 122.94,27.18
S$60
  Top 0.813: E$13.P$7 32.77,27.69 | 29.21,27.43 32.77,28.45
  pour Top (isolate 0.305, no thermals): 43.81,24.13 35.24,24.13 35.24,26.67 31.11,26.67 31.11,43.18 57.15,43.18 57.15,37.47 46.35,37.47 43.81,34.92
S$62
  Top 0.813: 123.19,24.89 126.75,26.16 | E$68.P$7 126.75,25.4
  pour Top (isolate 0.305, no thermals): 125.48,29.97 125.48,24.64 129.29,24.64 129.29,21.59 138.94,21.59 138.94,23.62 152.91,23.62 152.91,29.97
S$64  (via drill 0.8)
  Top 0.813: v148.08,67.06 E$87.P$6
  Bottom 0.61: v148.08,67.06 151.89,67.06 arc-90 152.65,66.29 152.65,63.25 | E$1.P$1 152.65,63.25 | 152.65,63.25 E$2.P$2
S$83
  Top 1.93: 161.29,52.07 E$89.P$2
V5SBC  (via drill 0.8, 0.9)
  Top 0.813: E$87.P$1 v149.86,71.37 149.86,73.66 | E$87.P$7 v146.3,67.06 146.3,69.85
  Bottom 0.61: v146.3,67.06 146.3,64.01 arc90 147.07,63.25 E$1.P$2
  Bottom 1.93: 139.95,101.6 139.95,106.68 | 139.95,96.52 139.95,101.6 | 139.95,101.6 E$7.P$1
  other vias: 149.86,86.11 154.94,98.81 160.02,98.81 154.94,95 160.02,95 139.7,90.93 144.78,90.93 149.86,90.93 154.94,90.93 160.02,90.93 139.7,86.11 144.78,86.11 154.94,86.11 160.02,86.11 139.7,81.28 144.78,81.28 149.86,81.28 154.94,81.28 160.02,81.28 139.7,76.45 144.78,76.45 149.86,76.45 154.94,76.45 160.02,76.45 139.7,71.37 144.78,71.37 154.94,71.37 160.02,71.37
  pour Top (isolate 0.406, no thermals): 136.65,111.76 152.4,111.76 152.4,106.68 157.48,101.6 163.83,101.6 163.83,68.58 139.19,68.58 136.65,71.12
V6SBC  (via drill 1.4)  (1 unrouted)
  Top 1.93: 153.67,51.05 161.04,45.72
  Bottom 0.61: E$108.P$2 159.26,17.53 150.62,8.89 E$103.P$1 | E$108.P$1 v159.26,26.67
  pour Top (isolate 0.305, no thermals): 140.46,22.35 154.43,22.35 154.43,29.97 159,29.97 159,48.26 163.83,48.26 163.83,12.7 157.48,12.7 152.4,7.62 152.4,2.54 140.46,2.54
V9  (via drill 0.9)
  Top 0.813: E$86.P$2 127,81.28
  Bottom 0.61: E$86.P$2 E$95.P$1 E$96.P$1
  Bottom 1.93: E$10.P$1 E$3.P$2
  other vias: 120.14,97.54 124.71,97.54 129.29,97.54 133.86,97.54 120.14,92.96 124.71,93.73 129.29,93.73 133.86,92.96 120.14,88.39 133.86,88.39 120.14,82.8 124.46,82.8 129.29,82.8 133.86,82.8 120.14,77.98 124.71,77.98 129.29,77.98 133.86,77.98
  pour Top (isolate 0.406, no thermals): 118.87,111.76 135.13,111.76 135.13,76.2 118.87,76.2
V12BAT
  Top 0.61: 46.48,95.89 46.48,92.84 arc-90 45.72,92.08 21.21,92.08 arc90 20.32,91.19 20.32,78.87 arc90 21.08,78.11 24.26,78.11 | E$62.P$1 77.47,33.02 arc-90 76.45,34.04 E$42.P$1 | 63.5,101.6 E$104.P$1
  Top 2.184: E$46.P$2 E$42.P$1
  Top 2.54: 62.23,97.79 65.79,97.79 arc-90 67.82,95.76 67.82,42.16 arc90 69.85,40.13 E$46.P$2
  Bottom 1.93: E$8.P$1 E$57.P$1
  pour Top (isolate 0.406, no thermals): 44.7,111.76 64.77,111.76 64.77,93.98 58.42,93.98 58.42,87.5 49.28,87.5 49.28,93.98 44.7,93.98
V12OUT  (2 unrouted)
  Top 0.406: 149.61,58.17 E$113.P$2
  Top 0.813: 149.61,62.23 151.38,62.23 151.64,63.5 E$87.P$3 151.64,66.04 arc-90 152.65,67.31 156.72,67.31 | 149.61,62.23 143.26,62.23 134.37,71.12 131.06,71.12 | 149.61,62.23 149.61,58.17 149.61,47.24 arc90 150.62,46.23 156.21,46.23 arc-90 157.23,45.21 157.23,35.05 arc-90 156.46,34.29 E$78.P$2 | 131.06,71.12 E$92.P$1 | 131.06,71.12 E$86.P$4 | E$88.P$1 E$82.P$4 | 127.76,45.72 129.29,45.72 | 129.03,44.7 127.76,44.7
  Top 1.93: 129.79,35.56 E$88.P$1 | E$69.P$2 122.43,33.27
  Top 2.184: 102.11,34.29 102.11,39.37 105.41,36.07
  Top 2.54: 97.79,95.25 E$48.P$6 100.08,90.17 arc-90 102.11,88.14 102.11,39.37
  pour Top (isolate 0.406, no thermals): 82.55,111.76 99.57,111.76 99.57,93.98 82.55,93.98
  pour Top (isolate 0.305, no thermals): 101.09,37.34 101.09,31.24 156.21,31.24 156.21,37.34
V12PS  (via drill 1.4)
  Top 0.61: 67.82,21.59 E$58.P$1 E$115.P$2
  Top 2.184: E$47.P$2 E$44.P$1
  Top 2.54: 60.96,33.27 65.79,33.27 arc-90 67.82,31.24 67.82,21.59 67.82,9.14 arc90 69.85,7.11 E$47.P$2
  Bottom 0.61: E$24.P$2 v61.47,37.85
  pour Top (isolate 0.305, no thermals): 58.42,43.18 64.77,43.18 64.77,24.13 45.09,24.13 45.09,34.61 46.67,36.2 58.42,36.2
V24
  Top 0.813: E$13.P$5 27.94,27.94 | 27.94,27.94 27.94,28.26 | 27.94,28.26 27.94,30.16 | 27.94,28.26 28.89,29.53 | 27.94,27.94 29.21,29.21
  Top 1.016: E$25.P$4 E$31.P$1 6.35,50.55
  pour Top (isolate 0.406, no thermals): 12.7,111.76 43.18,111.76 43.18,93.98 13.97,93.98 8.89,88.9 8.89,48.26 13.97,43.18 29.84,43.18 29.84,28.89 27.3,28.89 27.3,33.34 24.45,36.2 2.54,36.2 2.54,101.6 7.62,101.6 12.7,106.68
V24HVAUX  (via drill 0.8)
  Bottom 0.61: E$101.P$2 107.7,53.34 arc-90 106.93,54.1 v106.93,56.39
  pour Top (isolate 0.406, no thermals): 101.09,111.76 117.35,111.76 117.35,93.98 109.98,93.98 109.98,56.64 112.52,54.86 112.52,44.45 104.39,44.45 104.39,93.98 101.09,93.98
(copper drawn outside any net)
  shapes: Bottom area x8, Top area x1

## Text on the board
tPlace: 10Base-FL/T | + | + | + | unregulated | + | + | converter | SBC | gnd | gnd | gnd | battery | ground | on/off | gnd | gnd | gnd | gnd | +24v | +24v | +12v | +12v | +24v | +9v | +5v | power | relay/ | battery | I/O uCntrlr | HV aux | supply | brakes | (in) | RB | RA | UC3906 | LM317 | 9.1v | RC | 0.1 | NPN | PNP | AP1184 | 0.1 | 1.0 OHM | 3 x 220uF (ESR 0.15) | 17v | 10uF | 0.1 | 50WQ03FN | 50WQ03FN | 2006 Jan 07 (1.3) | LM2588 | 0.1 | LM317 | G | 50WQ03FN | ATA Control Box Power Supply | 24v | 12v | P-Chan | 50WQ03FN | 2 x 10uF | 22uH | 33uH | S | (cathode) | 0.1 | 6v | 0.01 | 0.1 | ICL7673 | 3 x 22uF (ESR 0.3) | 3 x 3.3uF | 0.01 | 1200 | (low ESR) | 11v | 15uH | yellow | D | 3 x 33uF | LM2677 | (low ESR) | G | green | S | P-Chan | 2 x 100uF | (low ESR) | 1200 | LM2677